# Altium PCB FMC_DAC_PSU.PcbDoc (part 3 of 3)
Units mil, origin at the board's own origin, x right, y up, seen from the top; angles counter-clockwise.
Board outline 748.03 x 2716.54 mil, 6 copper layers (TOP, G1, L2, L3, P4, BOTTOM), stack 50.473 mil thick; 122 components, 60 nets, 337 pads, 202 vias.
Unrouted connection lines stored in the file: 1.
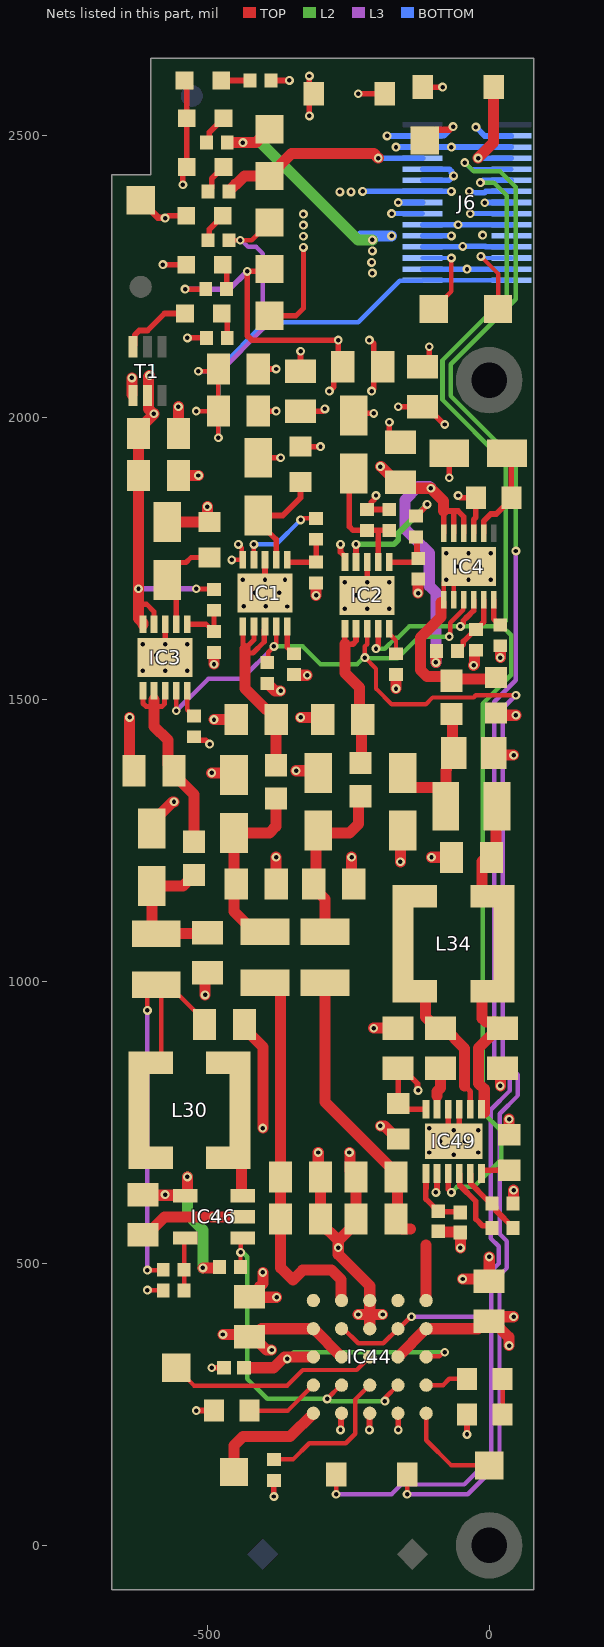
[diagram p6: the nets of this part, all layers, seen from the top]

## Via types
v1: diameter 15.75, hole 7.87, TOP to BOTTOM, tented both sides, 202 vias

## Nets (pads, with @x,y where several pads share a name; then routed paths per layer and width w, separated by ;. In a path a pad name is that pad's centre, name@x,y a point inside that pad or via, vN(x,y) a via of type N, cw(c..) or ccw(c..) an arc to the next point about the centre after c; other vN are vias at no path point)
GND: C1.1 C2.1 C3.1 C4.1 C5.1 C6.1 C7.2 C8.1 C9.1 C10.1 C11.1 C12.1 C13.1 C14.2 C15.1 C16.1 C17.1 C18.1 C19.2 C20.1 C21.1 C22.1 C23.1 C187.2 C190.1 C193.1 C195.1 C199.2 C207.1 C231.1 C261.2 C264.1 C265.1 C266.1 C267.1 C268.1 C269.1 C270.1 C271.1 C272.1 D1.2 D2.1 IC1.8 IC1.11 IC2.8 IC2.11 IC3.8 IC3.11 IC4.9 IC44.B5 IC44.C1 IC44.C2 IC44.C5 IC44.D5 IC46.2 IC49.9 IC49.10 IC49.13 J6.5 J6.6 J6.10 J6.12 J6.15 J6.16 J6.19 J6.20 J6.23 J6.24 J6.27 J6.28 LD2.2 LD3.1 LD4.1 LD5.1 LD6.1 R1.1 R3.1 R4.1 R5.1 R7.1 R8.1 R9.1 R10.1 R12.1 R14.1 R16.1 R17.1 R18.2 R125.2 R127.2 R129.1 R131.1 R136.2 T1.1 TP2.1 | length 4917.9
  TOP w7.87: v1(-606.3,452.76) -578.82,452.76 R131.1@-578.06,452
  TOP w10: v1(-578.74,2271.65) LD4.1@-537.4,2271.65 ; v1(-574.8,1598.43) IC3.8@-574.8,1633.86 ; v1@-569.31,2358.27 LD3.1@-537.4,2358.27 ; v1(-543.31,2413.39) -543.31,2437.99 LD2.2@-536.42,2444.88 LD5.1@-536.42,2531.5 -536.42,2594.49 LD6.1@-540.35,2598.43 ; R12.1@-523.62,1434.25 -517.2,1427.83 -502.64,1427.83 v1(-496.06,1421.26) ; v1(-519.69,239.09) R125.2@-488.19,239.09 ; v1(-492.13,314.96) C195.1@-470.47,314.96 ; C7.2@-409.45,1929.13 v1(-370.08,1929.13) ; C2.1@-409.45,2011.81 v1(-377.95,2011.81) ; C3.1@-409.45,2086.61 v1(-377.95,2086.61) ; v1(-397.64,1712.6) IC1.8@-397.64,1748.03 ; v1(-381.89,86.61) R129.1@-381.89,115.35 ; R4.1@-334.65,1948.82 v1(-299.21,1948.82) ; C10.1@-334.65,2082.68 v1(-334.65,2118.11) ; v1(-318.9,2535.43) -318.9,2566.93 D1.2@-311.02,2574.8 -318.9,2582.68 v1(-318.9,2606.3) ; v1(-263.78,204.72) -262.82,205.68 -262.82,233.3 IC44.D5@-261.87,234.26 ; C14.2@-240.16,2003.94 -236.22,2007.87 v1(-204.72,2007.87) ; v1(-216.54,1708.66) IC2.8@-216.54,1744.09 ; R9.1@-216.54,1837.4 R9.1@-215.75,1837.4 ; v1(-212.6,204.72) -212.23,205.09 -212.23,233.89 IC44.C5@-211.87,234.26 ; v1(-212.6,2137.8) -211.04,2137.8 -205.19,2131.94 -204.65,2131.94 -204.65,2106.22 C9.1@-188.98,2090.55 -204.65,2074.88 -204.65,2051.26 v1(-208.66,2047.24) ; v1(-200.79,1862.2) -200.79,1860.65 -203.66,1857.78 -203.66,1855.39 -208.66,1850.39 -208.66,1849.68 -209.33,1849.01 -209.33,1843.82 R9.1@-215.75,1837.4 ; R8.1@-177.17,1837.4 R9.1@-215.75,1837.4 ; v1(-177.17,1992.13) -177.17,1972.36 -161.5,1956.69 C20.1@-157.48,1956.69 ; IC44.B5@-161.87,234.26 -161.42,233.81 v1(-161.42,204.72) ; C21.1@-118.11,2090.55 -106.3,2102.36 v1(-106.3,2125.98) ; D2.1@-118.11,2586.61 v1(-82.68,2586.61) ; IC49.10@-72.83,773.62 -72.83,726.38 IC49.13@-62.99,716.54 -53.15,726.38 IC49.9@-53.15,773.62 ; v1(-70.87,1893.7) C23.1@-70.87,1937.01 ; v1(-55.12,1862.2) -51.18,1858.27 R18.2@-23.62,1858.27 -23.62,1823.58 -27.48,1819.72 -27.48,1795.35 IC4.9@-27.56,1795.28 ; v1(-39.37,196.85) R127.2@-39.37,232.28 ; v1@-8.17,2381.89 v1(-7.87,2381.58)
  TOP w11.81: TP2.1@-618.11,2385.83 -587.37,2355.08 -575.56,2355.08 v1(-574.8,2354.33) ; v1(-590.55,1578.74) -586.61,1574.8 IC3.11@-574.8,1574.8 ; IC1.11@-397.64,1688.98 -392.8,1693.82 -380.98,1693.82 v1(-362.2,1712.6) ; v1(-62.99,692.91) IC49.13@-62.99,716.54
  TOP w19.68: v1(-637.8,1468.5) -637.8,1381.89 C15.1@-629.92,1374.02 C15.1@-633.86,1370.08 ; T1.1@-633.86,2041.34 v1(-633.86,2070.87) ; C207.1@-614.17,551.18 -607.28,551.18 -575.79,582.68 v1(-488.19,582.68) IC46.2@-437.01,582.68 ; C261.2@-598.43,1271.65 -598.43,1282.48 -562.01,1318.9 v1(-559.06,1318.9) ; C19.2@-570.87,1814.96 R14.1@-496.06,1814.96 -500,1818.9 v1(-500,1842.52) ; C16.1@-551.18,1897.64 v1(-515.75,1897.64) ; C17.1@-551.18,1972.44 v1(-551.18,2019.68) ; v1(-503.94,976.38) -503.94,1011.81 C18.1@-500,1015.75 ; v1(-492.13,1370.08) -456.69,1370.08 C187.2@-452.76,1366.14 ; v1(-488.19,1464.57) C1.1@-448.82,1464.57 ; v1(-488.19,1562.99) R10.1@-488.19,1583.86 ; C231.1@-434.05,923.61 -434.05,916.72 -401.57,884.24 v1(-401.57,740.16) ; C193.1@-425.2,440.94 -418.31,440.94 -407.48,451.77 -407.48,458.66 -401.57,464.57 v1(-401.57,484.25) ; C193.1@-420.36,440.04 v1(-377.05,440.04) ; C6.1@-377.95,1173.23 v1(-377.95,1220.47) ; R3.1@-346.46,1544.49 -345.28,1543.31 v1(-322.83,1543.31) ; v1(-342.52,1374.02) -307.09,1374.02 C199.2@-303.15,1370.08 ; v1(-334.65,1468.5) -299.21,1468.5 C8.1@-295.28,1464.57 ; v1(-307.09,1685.04) R1.1@-307.09,1707.09 ; v1(-303.15,696.85) -303.15,657.48 C5.1@-299.21,653.54 C4.1@-299.21,578.74 -299.21,571.85 -267.72,540.35 ; v1(-248.03,696.85) -247.05,695.87 -247.05,664.37 C12.1@-236.22,653.54 C11.1@-236.22,578.74 -236.22,571.85 -267.72,540.35 ; v1(-244.09,1220.47) -244.09,1177.17 C13.1@-240.16,1173.23 ; v1(-232.28,409.45) -232.09,409.26 -211.87,409.26 ; IC44.C2@-211.87,384.26 -211.87,409.26 ; v1(-204.72,917.32) C264.1@-161.42,917.32 ; v1(-192.91,744.09) -186.02,744.09 -162.4,720.47 C265.1@-161.42,720.47 ; v1(-188.98,409.45) -189.17,409.26 -211.87,409.26 ; v1(-165.35,1519.68) R7.1@-165.35,1544.49 ; v1(-157.48,1212.6) -157.48,1263.78 C268.1@-153.54,1267.72 ; v1(-125.98,1688.98) R5.1@-125.98,1713.78 ; v1(-102.36,1220.47) C266.1@-66.93,1220.47 ; C272.1@-90.55,557.09 -89.57,556.1 -52.17,556.1 C271.1@-51.18,555.12 v1(-51.18,527.56) ; v1(-47.24,472.44) -3.94,472.44 C190.1@0,468.5 v1(0,511.81) ; v1(-27.56,1561.1) -25.98,1562.68 -25.98,1586.22 -24.41,1587.8 R16.1@-23.62,1587.8 ; C269.1@7.87,1405.51 11.81,1401.57 v1(43.31,1401.57) ; C22.1@11.81,1476.38 15.75,1472.44 v1(47.24,1472.44) ; v1(19.69,814.96) 19.69,842.52 C267.1@23.62,846.46 ; v1(19.69,1574.8) R17.1@19.69,1595.67 ; C270.1@35.43,728.35 v1(35.43,755.91) ; R136.2@42.13,606.3 43.31,607.48 v1(43.31,629.92) ; -267.72,540.35 v1(-267.72,528.05) -267.72,515.75 -211.87,459.9 IC44.C1@-211.87,434.26 -211.87,409.26
  BOTTOM w10: v1(-165.35,2480.31) J6.6@-118.11,2480.31 v1(-66.93,2480.31) J6.5@39.37,2480.31 ; v1(-161.42,2381.89) J6.16@-118.11,2381.89 ; J6.28@-118.11,2263.78 v1(-39.37,2263.78) J6.27@39.37,2263.78 ; J6.24@-118.11,2303.15 -47.93,2303.15 v1(-46.95,2304.13) -7.2,2304.13 -6.22,2303.15 J6.23@39.37,2303.15 ; J6.20@-118.11,2342.52 v1(-55.12,2342.52) J6.19@39.37,2342.52 ; J6.12@-118.11,2421.26 -71.51,2421.26 -63.63,2429.13 v1(-62.99,2429.13) ; J6.10@-118.11,2440.94 -70.87,2440.94 -66.95,2437.02 v1@-66.95,2434.64 ; v1(-7.87,2381.58) -7.64,2381.81 39.29,2381.81 J6.15@39.37,2381.89
  other v1: -106.3,696.85 -19.69,696.85 -86.61,716.54 -43.31,716.54 -62.99,736.22 -19.69,736.22 -106.3,740.16 -614.17,1551.18 -574.8,1551.18 -535.43,1551.18 -555.12,1578.74 -614.17,1598.43 -535.43,1598.43 -255.91,1661.42 -216.54,1661.42 -177.17,1661.42 -358.27,1665.35 -435.63,1666.12 -396.26,1666.12 -236.22,1685.04 -196.85,1685.04 -415.94,1689.74 -372.64,1689.74 -255.91,1708.66 -177.17,1708.66 -437.01,1712.6
N3V0A: C20.2 C21.2 D2.2 IC4.10 IC4.11 IC4.12 J6.7 J6.8 R15.2 R20.2 TP32.1 | length 1355.7
  TOP w10: v1(-161.42,2019.68) C21.2@-118.11,2019.68 -111.22,2019.68 -79.72,1988.19 v1(-78.74,1988.19) ; IC4.12@-80.71,1795.28 -80.71,1834.65 -55.12,1834.65 -45.28,1824.81 IC4.10@-45.28,1795.28 ; IC4.11@-62.99,1795.28 -62.99,1830.71
  TOP w19.68: R20.2@-461.81,2401.57 -461.81,2402.36 -449.88,2414.29 -449.09,2414.29 -434.25,2429.13 TP32.1@-389.76,2429.13 -350.39,2468.5 -204.72,2468.5 v1(-196.85,2460.63) ; v1(-192.91,1913.39) -191.93,1913.39 -164.37,1885.83 C20.2@-157.48,1885.83 -146.65,1875 v1(-103.35,1875) -80.71,1852.36 -80.71,1834.65 ; v1(-94.66,1566.16) -94.66,1585.26 R15.2@-93.31,1586.61 ; v1(-19.69,2460.63) 7.87,2488.19 D2.2@7.87,2586.61
  L3 w19.68: v1(-103.35,1875) -106.3,1877.95 -125.98,1877.95 -149.61,1854.33 -149.61,1803.15 -118.11,1771.65 -117.83,1771.65 -106.3,1760.12 -106.3,1701.42 -94.66,1689.77 v1(-94.66,1566.16)
  BOTTOM w10: v1(-196.85,2460.63) J6.8@-118.11,2460.63 ; v1(-19.69,2460.63) J6.7@39.37,2460.63
N3V5: C266.2 C267.2 IC49.7 L34.2 L35.1 | length 437.3
  TOP w19.68: L34.2@-12.8,982.55 -12.8,935.04 -5.91,928.15 12.8,928.15 C267.2@23.62,917.32 16.73,917.32 -18.78,881.81 -18.78,819.64 -8.78,809.64 IC49.7@-8.78,767.72 ; L34.2@-12.8,1151.3 -12.8,1213.09 12.3,1238.19 12.3,1309.55 L35.1@13.78,1311.02
NetC1_2: C1.2 IC1.1 IC1.2 IC1.3 L1.2 | length 382.7
  TOP w9: IC1.1@-437.01,1629.92 -437.01,1594.49 -433.07,1590.55 -417.32,1606.3 IC1.2@-417.32,1625.98 ; -433.07,1582.68 -419,1582.68 -399.04,1602.64 -399.04,1624.58 IC1.3@-397.64,1625.98
  TOP w19.68: -433.07,1590.55 -433.07,1519.68 -395.67,1482.28 -388.78,1482.28 -377.95,1471.46 C1.2@-377.95,1464.57 L1.2@-377.95,1383.86
NetC7_1: C7.1 IC1.7 R4.2 | length 207.2
  TOP w10: IC1.7@-377.95,1748.03 -377.95,1784.45 -409.45,1815.94 C7.1@-409.45,1826.77 -366.14,1826.77 -334.65,1858.27 R4.2@-334.65,1885.83
NetC8_2: C8.2 IC2.1 IC2.2 L2.2 | length 296.7
  TOP w10: IC2.1@-255.91,1625.98 -255.91,1598.43 -242.08,1598.43 -236.22,1604.28 IC2.2@-236.22,1625.98
  TOP w19.68: -255.91,1598.43 -255.91,1547.24 -230.32,1521.65 -230.32,1470.47 C8.2@-224.41,1464.57 -226.38,1462.6 -226.38,1389.76 L2.2@-228.35,1387.8
NetC14_1: C14.1 IC2.7 R8.2 R9.2 | length 227.7
  TOP w10: C14.1@-240.16,1901.57 -248.03,1893.7 -248.03,1807.09 -241.34,1800.39 R9.2@-216.54,1800.39 -196.85,1800.39 ; IC2.7@-196.85,1744.09 -196.85,1800.39 ; R8.2@-177.17,1800.39 -196.85,1800.39
NetC15_2: C15.2 IC3.1 IC3.2 IC3.3 L3.2 | length 369.6
  TOP w9: IC3.1@-614.17,1515.75 -614.17,1493.46 -608.9,1488.19 -594.49,1488.19 -580.08,1488.19 -576.21,1492.06 -576.21,1514.34 IC3.3@-574.8,1515.75
  TOP w19.68: IC3.2@-594.49,1500 -594.49,1488.19 -594.49,1452.76 -569.88,1428.15 -569.88,1384.84 C15.2@-559.06,1374.02 -559.06,1367.13 -523.62,1331.69 L3.2@-523.62,1248.03
NetC19_1: C19.1 IC3.7 R14.2 | length 182.7
  TOP w9: IC3.7@-555.12,1633.86 -555.12,1696.85 C19.1@-570.87,1712.6 -570.87,1723.43 -550.76,1743.53 -537.68,1743.53 -529.25,1751.97 R14.2@-496.06,1751.97
NetC22_2: C22.2 IC4.1 IC4.2 IC4.13 L36.2 | length 386.1
  TOP w7.87: IC4.1@-80.71,1677.17 -80.71,1707.95 v1(-76.07,1712.6) ; IC4.2@-62.99,1677.17 -62.99,1709.65 IC4.13@-36.42,1736.22
  TOP w19.68: IC4.1@-85.63,1672.24 -85.63,1646.65 -122.05,1610.24 -122.05,1553.01 -110.52,1541.48 -74.94,1541.48 L36.2@-66.93,1533.46 -63.98,1536.42 8.86,1536.42 C22.2@11.81,1539.37
  other v1: -36.7,1712.6 2.67,1712.6 -56.38,1736.22 -17.01,1736.22 -76.07,1759.84 -36.7,1759.84 2.67,1759.84
NetC23_2: C23.2 IC4.8 R18.1 | length 171.1
  TOP w10: IC4.8@-9.84,1795.28 -9.76,1795.35 -9.76,1817.01 2.67,1829.44 12.51,1829.44 39.37,1856.3 R18.1@39.37,1858.27 39.37,1929.13 C23.2@31.5,1937.01
NetC195_2: C195.2 IC44.A3 IC44.E3 | length 447.2
  TOP w7.87: IC44.A3@-111.87,334.26 -110.98,335.15 -88.24,335.15 -80.87,342.52 v1(-78.74,342.52)
  TOP w19.68: C195.2@-435.04,314.96 -382.45,314.96 v1@-363.15,334.26 ; v1@-358.27,334.26 IC44.E3@-311.87,334.26
  L2 w7.87: v1(-358.27,330.71) -346.46,342.52 v1(-78.74,342.52)
NetC263_1: C263.1 IC49.11 | length 51.8
  TOP w19.68: -92.52,797.07 -92.52,805.12 -86.61,811.02 C263.1@-86.61,846.46
NetC263_2: C263.2 IC49.8 L34.1 | length 250
  TOP w10: -43.46,815.12 -33.46,805.12 IC49.8@-33.46,773.62
  TOP w19.68: L34.1@-113.19,982.55 -113.19,937.01 -93.5,917.32 -79.72,917.32 -43.46,881.06 -43.46,815.12
NetC268_2: C268.2 C269.2 L35.2 L36.1 | length 273.4
  TOP w19.68: C268.2@-153.54,1370.08 -153.54,1359.25 -138.78,1344.49 -90.55,1344.49 L35.2@-76.77,1330.71 ; L35.2@-76.77,1311.02 L35.2@-76.77,1330.71 ; L36.1@-66.93,1474.41 -64.96,1472.44 -64.96,1415.35 -59.06,1409.45 -75.79,1392.72 -75.79,1376.26 -76.77,1375.28 L35.2@-76.77,1330.71
NetC270_2: C270.2 IC49.6 | length 54.6
  TOP w10: IC49.6@-13.78,659.45 -13.78,664.45 -12.87,665.35 C270.2@35.43,665.35
NetC271_2: C271.2 C272.2 IC49.1 | length 116.2
  TOP w10: IC49.1@-112.2,659.45 -112.2,633.55 -112.36,633.39 -112.36,614.33 -89.57,591.54 -52.17,591.54 C271.2@-51.18,590.55
NetIC1_5: IC1.5 R3.2 | length 49.8
  TOP w9: IC1.5@-358.27,1625.98 -358.27,1592.52 -347.24,1581.5 R3.2@-346.46,1581.5
NetIC1_6: IC1.6 R1.2 R2.1 | length 95.1
  TOP w10: IC1.6@-358.27,1748.03 -358.27,1745 -357.36,1744.09 R1.2@-307.09,1744.09 R2.1@-307.09,1784.65
NetIC2_5: IC2.5 R7.2 | length 49.6
  TOP w7.87: IC2.5@-177.17,1625.98 -177.17,1616.14 -175.2,1614.17 -174.8,1614.17 -165.35,1604.72 R7.2@-165.35,1581.5
NetIC2_6: IC2.6 R5.2 R6.1 | length 93.4
  TOP w10: IC2.6@-177.17,1744.09 -133.46,1744.09 -126.77,1750.79 R5.2@-125.98,1750.79 -127.95,1752.76 -127.95,1786.61 R6.1@-129.92,1788.58
NetIC3_5: IC3.5 R12.2 | length 49.8
  TOP w8: IC3.5@-535.43,1515.75 -535.43,1482.28 -524.41,1471.26 R12.2@-523.62,1471.26
NetIC3_6: IC3.6 R10.2 R11.1 | length 90.4
  TOP w9: IC3.6@-535.43,1633.86 -501.97,1633.86 -488.98,1620.87 R10.2@-488.19,1620.87 R11.1@-488.19,1658.66
NetIC4_5: IC4.5 R15.1 R16.2 | length 110.7
  TOP w10: R15.1@-56.3,1586.61 -56.3,1587.4 -45.83,1597.87 -45.83,1603.39 -24.41,1624.8 -22.83,1624.8 -9.84,1637.8 IC4.5@-9.84,1677.17
NetIC4_6: IC4.6 R17.2 | length 49.8
  TOP w10: IC4.6@7.87,1677.17 7.87,1643.7 18.9,1632.68 R17.2@19.69,1632.68
NetIC44_A4: IC44.A4 R126.1 | length 77.1
  TOP w8: IC44.A4@-111.87,284.26 -81.88,284.26 -70.87,295.28 R126.1@-39.37,295.28
NetIC44_A5: IC44.A5 TP26.1 | length 178.1
  TOP w7.87: IC44.A5@-111.87,234.26 -111.87,186.67 -66.93,141.73 TP26.1@0,141.73
NetIC44_C3: IC44.C3 TP27.1 | length 377.3
  TOP w7.87: TP27.1@-555.12,314.96 -523.62,283.46 -358.27,283.46 -330.71,311.02 -235.1,311.02 IC44.C3@-211.87,334.26
NetIC44_C4: IC44.C4 R129.2 | length 260.2
  TOP w7.87: R129.2@-381.89,152.36 -348.03,152.36 -319.29,181.1 -254.41,181.1 -237.42,198.09 -237.42,258.7 IC44.C4@-211.87,284.26
NetIC44_E4: IC44.E4 R125.1 | length 132
  TOP w7.87: R125.1@-425.2,239.09 -357.03,239.09 IC44.E4@-311.87,284.26
NetIC44_E5: IC44.E5 TP25.1 | length 211.8
  TOP w19.68: TP25.1@-452.76,129.92 -452.76,177.17 -437.01,192.91 -353.21,192.91 IC44.E5@-311.87,234.26
NetIC46_3: IC46.3 L30.1 | length 153.9
  TOP w19.68: L30.1@-441.93,771.66 -439.47,769.2 -439.47,622.05 -437.5,620.08 IC46.3@-437.01,620.08
NetIC46_5: IC46.5 R130.1 R131.2 | length 94
  TOP w7.87: R131.2@-541.06,452 R130.1@-541.06,489 -541.06,543.59 IC46.5@-539.37,545.28
NetIC49_4: IC49.4 R135.1 | length 128.2
  TOP w10: IC49.4@-53.15,659.45 -52.24,658.54 -52.24,638.86 -23.62,610.24 -23.62,578.74 -11.81,566.93 1.18,566.93 R135.1@5.12,562.99
NetIC49_5: IC49.5 R135.2 R136.1 | length 129.7
  TOP w10: IC49.5@-33.46,659.45 -32.56,658.54 -32.56,641.45 -4.61,613.5 -1.3,613.5 5.12,607.09 R136.1@5.12,606.3 11.54,599.88 11.54,594.37 42.13,563.78 R135.2@42.13,562.99
NetJ6_25: J6.25 TP33.1 | length 161.1
  TOP w7.87: v1(-14.61,2286.26) 15.75,2255.91 TP33.1@15.75,2192.91
  BOTTOM w7.87: v1(-14.61,2286.26) -12.48,2286.26 -9.68,2283.46 J6.25@39.37,2283.46
NetJ6_26: J6.26 TP34.1 | length 154.8
  TOP w7.87: TP34.1@-98.43,2192.91 -66.93,2224.41 v1(-66.93,2283.46)
  BOTTOM w7.87: J6.26@-118.11,2283.46 v1(-66.93,2283.46)
NetLD1_1: LD1.1 T1.6 | length 127.4
  TOP w10: T1.6@-631.89,2125.98 -629.02,2128.86 -629.02,2146.57 -620.8,2154.79 -606.09,2154.79 -575.85,2185.04 LD1.1@-539.37,2185.04
NetLD1_2: LD1.2 R19.1 | length 47.4
  TOP w10: LD1.2@-474.41,2185.04 -464.57,2175.2 R19.1@-464.57,2141.73
NetLD2_1: LD2.1 R20.1 | length 54.6
  TOP w10: R20.1@-498.82,2401.57 -492.4,2407.99 -492.4,2423.94 LD2.1@-471.46,2444.88
NetLD3_2: LD3.2 R21.1 | length 54.2
  TOP w10: R21.1@-498.82,2314.96 -496.33,2317.45 -496.33,2334.38 LD3.2@-472.44,2358.27
NetLD4_2: LD4.2 R22.1 | length 46.1
  TOP w10: LD4.2@-472.44,2271.65 -465.75,2264.96 R22.1@-465.75,2228.35
NetLD5_2: LD5.2 R23.1 | length 55.8
  TOP w10: R23.1@-501.57,2488.19 -496.35,2493.42 -496.35,2506.61 LD5.2@-471.46,2531.5
NetLD6_2: LD6.2 R24.1 | length 51.4
  TOP w10: LD6.2@-475.39,2598.43 R24.1@-424.02,2598.43
NetR126_2: R126.2 R127.1 | length 63
  TOP w8: R127.1@23.62,232.28 R126.2@23.62,295.28
P1V8A: C16.2 C17.2 IC3.9 IC3.10 J6.17 J6.18 R11.2 T1.2 TP30.1 | length 948.3
  TOP w9: -622.05,1669.29 -607.63,1669.29 -594.49,1656.15 IC3.9@-594.49,1633.86 ; v1(-519.69,1696.85) -519.09,1696.26 -488.78,1696.26 R11.2@-488.19,1695.67 ; TP30.1@-389.76,2181.1 -342.52,2181.1 -329.49,2194.13 v1(-329.49,2302.31)
  TOP w19.68: IC3.10@-614.17,1633.86 -614.17,1635.83 -622.05,1643.7 -622.05,1669.29 v1(-622.05,1696.85) C16.2@-622.05,1897.64 -622.05,1979.33 -594.8,2006.58 v1(-594.8,2007.19) ; T1.2@-604.33,2037.4 -604.33,2015.43 v1@-595.45,2006.55 ; T1.2@-604.33,2041.34 -604.33,2072.83 v1(-602.36,2074.8)
  L3 w9: v1(-622.05,1696.85) v1(-519.69,1696.85)
  BOTTOM w9: v1(-173.23,2362.2) J6.18@-118.11,2362.2 ; v1(-33.62,2362.2) J6.17@39.37,2362.2
  other v1: -329.49,2322 -329.49,2341.68 -329.49,2361.37
P2V3: C18.2 C261.1 L3.1 L32.2 | length 262.2
  TOP w19.68: L3.1@-523.62,1188.98 -543.31,1169.29 C261.1@-598.43,1169.29 -598.43,1092.52 L32.2@-590.55,1084.65 -589.57,1085.63 -500.98,1085.63 C18.2@-500,1086.61
P2V3_N: C231.2 L30.2 L32.1 R130.2 | length 789.1
  TOP w7.87: v1(-606.3,488.19) -578.87,488.19 R130.2@-578.06,489 ; v1(-606.3,948.82) -606.3,978.35 L32.1@-590.55,994.09 L32.1@-581.69,985.23 ; L30.2@-581.69,856.03 L32.1@-581.69,985.23 ; C231.2@-504.92,923.61 -504.92,930.5 -548.83,974.41 -570.87,974.41 L32.1@-581.69,985.23
  L3 w7.87: v1(-606.3,488.19) v1(-606.3,948.82)
P3V3: C207.2 IC46.4 J6.21 J6.22 R13.2 R23.2 R128.1 TP31.1 | length 835.8
  TOP w19.68: C207.2@-614.17,622.05 -613.19,621.06 -540.35,621.06 IC46.4@-539.37,620.08 -537.4,620.08 -535.43,622.05 v1(-535.43,653.54) ; v1(-507.87,492.13) -479.9,492.13 R128.1@-478.42,493.61 ; R23.2@-464.57,2488.19 v1(-437.01,2488.19) -413.39,2488.19 TP31.1@-389.76,2511.81 ; R13.2@-393.7,1528.74 -392.91,1528.74 -379.92,1515.75 v1(-370.08,1515.75)
  L2 w19.68: v1(-535.43,653.54) -535.43,586.61 -507.87,559.06 v1(-507.87,492.13) ; v1(-437.01,2488.19) -405.51,2488.19 -233.05,2315.73 v1(-207.28,2315.73)
  BOTTOM w10: J6.22@-118.11,2322.83 v1(-66.93,2322.83)
  BOTTOM w19.68: -228.35,2322.83 v1(-173.23,2322.83)
  other v1: -574.8,622.05 -207.28,2256.67 -208.66,2275.59 -207.28,2296.04 -11.81,2323.98
P3V3A: C2.2 C3.2 IC1.9 IC1.10 J6.29 J6.30 R2.2 R21.2 TP29.1 | length 1526.7
  TOP w7.87: v1(-519.69,2011.81) C2.2@-480.31,2011.81 ; v1(-515.75,2082.68) -484.25,2082.68 C3.2@-480.31,2086.61 C2.2@-480.31,2011.81 ; v1(-480.31,1964.57) C2.2@-480.31,2011.81 ; R21.2@-461.81,2314.96 v1(-441.54,2314.96) -421.26,2314.96 TP29.1@-389.76,2346.46 ; v1(-456.69,1748.03) IC1.10@-437.01,1748.03 -438.98,1750 -438.98,1769.69 v1(-444.88,1775.59) ; IC1.9@-417.32,1748.03 v1(-417.32,1775.59) ; v1(-334.65,1818.9) -332.51,1818.9 -329.76,1821.65 R2.2@-307.09,1821.65
  L3 w7.87: v1(-515.75,2082.68) -476.38,2082.68 -401.57,2157.48 -401.57,2291.34 -413.39,2303.15 -427.59,2303.15 -439.4,2314.96 v1(-441.54,2314.96)
  BOTTOM w7.87: v1(-480.31,1964.57) -480.31,2086.61 -397.64,2169.29 -232.28,2169.29 -158.45,2243.12 -119.08,2243.12 J6.30@-118.11,2244.09 J6.29@39.37,2244.09 ; v1(-417.32,1775.59) -377.95,1775.59 v1(-334.65,1818.9)
P3V7: C6.2 C187.1 L1.1 L19.2 | length 338.5
  TOP w19.68: L19.2@-397.64,1088.58 -417.32,1088.58 -452.76,1124.02 C187.1@-452.76,1263.78 -389.76,1263.78 -377.95,1275.59 L1.1@-377.95,1324.8
P3V7_N: C4.2 C5.2 IC44.D1 IC44.E1 L19.1 | length 693.1
  TOP w19.68: L19.1@-397.64,998.03 -383.86,998.03 -370.08,984.25 C5.2@-370.08,653.54 C4.2@-370.08,578.74 -370.08,492.47 -348.25,470.65 -330.71,488.19 -279.53,488.19 -262.62,471.28 -262.62,435.01 IC44.D1@-261.87,434.26
P5V0A: C9.2 C10.2 D1.1 IC2.9 IC2.10 J6.13 J6.14 R6.2 R22.2 TP28.1 | length 1167.6
  TOP w10: v1(-539.37,2228.35) R22.2@-502.76,2228.35 ; TP28.1@-389.76,2263.78 -393.7,2259.84 v1(-429.13,2259.84) -429.13,2145.67 -421.26,2137.8 v1(-267.72,2137.8) -267.72,2098.43 C9.2@-259.84,2090.55 -275.51,2074.88 -275.51,2055.2 v1(-283.46,2047.24) ; C10.2@-334.65,2011.81 -295.28,2011.81 v1(-291.34,2015.75) ; v1(-263.78,1775.59) -263.78,1761.81 -255.91,1753.94 IC2.10@-255.91,1744.09 ; IC2.9@-236.22,1744.09 v1(-236.22,1775.59) ; v1(-232.28,2574.8) D1.1@-185.04,2574.8 ; R6.2@-129.92,1825.59 -129.13,1825.59 -110.24,1844.49 v1(-110.24,1846.46)
  L3 w10: v1(-539.37,2228.35) -460.63,2228.35 v1(-429.13,2259.84)
  L2 w10: v1(-236.22,1775.59) -169.29,1775.59 -161.42,1783.46 -161.42,1795.28 v1(-110.24,1846.46)
  BOTTOM w10: v1(-224.41,2401.57) v1(-66.93,2401.57) ; v1(-35.43,2401.57) -31.5,2401.57 -29.37,2399.45 -8.34,2399.45 -6.22,2401.57 J6.13@39.37,2401.57
  other v1: -264.82,2400.81 -245.13,2400.81
P5V5: C13.2 C199.1 L2.1 L28.2 | length 320.6
  TOP w19.68: L28.2@-291.34,1088.58 -291.34,1146.65 -311.02,1166.34 C13.2@-311.02,1173.23 -307.09,1177.17 -307.09,1263.78 C199.1@-303.15,1267.72 -299.21,1263.78 -247.75,1263.78 -232,1279.53 -232,1325.08 L2.1@-228.35,1328.74
P5V5_N: C11.2 C12.2 IC44.A1 IC44.B1 L28.1 | length 613
  TOP w19.68: L28.1@-291.34,998.03 -291.34,786.42 -162.62,657.7 C11.2@-162.62,575.02 ; C11.2@-165.35,578.74 -165.35,577.76 C11.2@-162.62,575.02 ; IC44.B1@-162.62,435.01 IC44.B1@-161.87,434.26 ; -139.89,561.02 -154.53,561.02 -162.62,569.12 C11.2@-162.62,575.02 ; IC44.A1@-111.87,434.26 -111.87,533
P12V0: C190.2 C193.2 C264.2 C265.2 IC44.A2 IC44.B3 IC44.D3 IC44.E2 IC49.2 IC49.12 J6.3 J6.4 R19.2 R24.2 TP1.1 | length 1106.5
  TOP w10: v1(-535.43,2141.73) R19.2@-501.57,2141.73 ; R24.2@-387.01,2598.43 v1(-354.33,2598.43) ; v1(-125.98,807.09) -127.08,808.19 -127.08,819.01 -154.53,846.46 C264.2@-161.42,846.46 C265.2@-161.42,783.46 -151.57,773.62 IC49.12@-112.2,773.62 ; v1(-94.49,625.98) -94.49,627.54 -92.52,629.51 IC49.2@-92.52,659.45
  TOP w11.81: TP1.1@-114.17,2492.13 -95.08,2511.22 -70.55,2511.22 -65.16,2516.62 v1(-64.09,2516.62)
  TOP w19.68: v1(-472.44,374.02) -429.13,374.02 C193.2@-425.2,370.08 C193.2@-418.31,370.08 ; v1(-385.85,346.48) -394.71,346.48 C193.2@-418.31,370.08 ; IC44.D3@-261.87,334.26 IC44.E2@-311.87,384.26 -404.13,384.26 C193.2@-418.31,370.08 ; IC44.B3@-161.87,334.26 IC44.A2@-111.87,384.26 -20.27,384.26 -6.89,397.64 C190.2@0,397.64 ; v1(35.43,354.33) 35.43,369.09 6.89,397.64 C190.2@0,397.64 ; v1(43.31,405.51) 7.87,405.51 C190.2@0,397.64
  BOTTOM w10: v1(-181.1,2500) J6.4@-118.11,2500 -118.03,2500.08 -80.63,2500.08 v1(-64.09,2516.62) ; v1(-23.62,2515.75) -7.87,2500 J6.3@39.37,2500
PG_3V7_5V5: IC44.B4 IC44.D4 IC46.1 R128.2 | length 619.1
  TOP w7.87: R128.2@-441.42,493.61 -441.18,493.84 -441.18,519.45 v1(-440.94,519.68) -440.94,541.34 IC46.1@-437.01,545.28 ; v1(-287.4,259.84) -262.98,284.26 IC44.D4@-261.87,284.26 ; v1(-185.04,255.91) -185.04,261.09 IC44.B4@-161.87,284.26
  L2 w7.87: v1(-440.94,519.68) -437.01,519.68 -429.13,511.81 -429.13,295.28 -393.7,259.84 v1(-287.4,259.84) -285.27,259.84 -281.33,255.91 v1(-185.04,255.91)
PG_DAC: D3.2 IC1.4 IC2.3 IC3.4 IC4.3 R13.1 | length 2754.3
  TOP w7.87: v1(-555.12,1480.31) IC3.4@-555.12,1515.75 ; R13.1@-393.7,1565.75 -392.01,1567.43 -392.01,1584.36 v1(-381.89,1594.49) -381.89,1596.62 -377.95,1600.56 IC1.4@-377.95,1625.98 ; IC2.3@-216.54,1625.98 -216.54,1598.58 -220.47,1594.64 v1(-220.47,1574.8) -200.79,1555.12 -200.79,1519.68 -173.23,1492.13 -112.2,1492.13 -100.39,1503.94 -27.56,1503.94 -23.62,1507.87 v1(47.24,1507.87) ; v1(-145.67,90.55) D3.2@-145.67,125.98
  TOP w8: v1(-70.87,1612.05) -69.38,1613.53 -69.38,1636.52 -63.97,1641.93 -63.97,1642.01 -46.2,1659.79 -46.2,1676.24 IC4.3@-45.35,1677.09
  L3 w7.87: v1(-555.12,1480.31) -498.03,1537.4 -438.98,1537.4 v1(-381.89,1594.49) ; v1(-145.67,90.55) -37.93,90.55 18.23,146.71 18.23,478.86 31.5,492.13 31.5,539.37 18.62,552.24 18.62,765.69 50.97,798.04 50.97,834.85 24.21,861.61 24.21,1484.84 v1(47.24,1507.87)
  L2 w7.87: v1(-381.89,1594.49) -330.71,1594.49 -299.21,1562.99 -234.41,1562.99 -222.6,1574.8 v1(-220.47,1574.8) -216.54,1574.8 -215.47,1573.74 -162.48,1573.74 -124.17,1612.05 v1(-70.87,1612.05)
PGOOD: IC2.4 IC4.4 IC49.3 J6.11 | length 2444.2
  TOP w10: v1(-200.79,1590.55) -200.79,1592.11 -196.85,1596.04 IC2.4@-196.85,1625.98 ; IC49.3@-72.83,659.45 -72.83,631.89 v1(-66.93,625.98) ; v1(-51.18,1629.92) -45.83,1635.28 -45.83,1640.36 -38.96,1647.23 -38.36,1647.23 -27.64,1657.95 -27.64,1677.09 IC4.4@-27.56,1677.17
  L2 w8: v1(-200.79,1590.55) -185.04,1590.55 -165.35,1610.24 -161.42,1610.24 -141.73,1629.92 v1(-51.18,1629.92) 23.62,1629.92 ; v1(-66.93,625.98) -57.24,635.67 -27.29,635.67 21.14,684.1 21.14,735.52 -11.81,768.48 -11.81,1492.88 39.37,1544.06 39.37,1614.17 23.62,1629.92 ; v1(-15.75,2417.32) 7.87,2417.32 31.5,2393.7 31.5,2216.54 -82.84,2102.2 -82.84,2031.91 29.37,1919.69 29.37,1639.61 23.62,1633.86 23.62,1629.92
  BOTTOM w10: v1(-15.75,2417.32) -14.19,2417.32 -10.26,2421.26 J6.11@39.37,2421.26
TEMP_ALARM: D3.1 IC44.B2 IC44.D2 J6.9 | length 3231.6
  TOP w7.87: v1(-271.65,90.55) D3.1@-271.65,125.98 ; IC44.D2@-261.87,384.26 -258.28,384.26 -232.28,358.27 -187.86,358.27 IC44.B2@-161.87,384.26 -160.46,384.26 -139.2,405.51 v1(-137.8,405.51)
  L3 w7.87: v1(-271.65,90.55) -173.23,90.55 -155.83,107.95 -44.12,107.95 3.94,156 3.94,405.51 ; v1(-137.8,405.51) 3.94,405.51 ; v1(47.24,1763.78) 47.24,1534.54 9.15,1496.45 9.15,855.37 36.72,827.79 36.72,806.68 2.87,772.83 2.87,544.37 16.81,530.43 16.81,499.94 3.94,487.07 3.94,405.51
  L2 w7.87: v1(-43.31,2452.76) -27.56,2437.01 19.69,2437.01 47.24,2409.45 47.24,2210.33 -67.99,2095.09 -67.99,2038.77 47.24,1923.53 v1(47.24,1763.78)
  BOTTOM w7.87: v1(-43.31,2452.76) -31.5,2440.94 J6.9@39.37,2440.94
pads on no net: B1.1 B2.1 FTG1.1 FTG2.FTG2 FTG3.1 FTG4.FTG2 IC4.7 J6.1 J6.2 T1.3 T1.4 T1.5

## Polygon pours and split planes (outlines as drawn)
P12V0 on BOTTOM "P12V0_L06_P012" (solid, remove dead copper, pour order 12): 39.37,2480.31 -220.47,2480.31 -535.43,2165.35 -535.43,1728.35 -464.57,1657.48 -452.76,1645.67 47.24,1645.67 74.8,1618.11 74.8,-62.99 62.99,-74.8 -657.48,-74.8 -665.35,-66.93 -665.35,2421.26 -661.42,2425.2 -598.43,2425.2 -590.55,2433.07 -590.55,2622.05 -582.68,2629.92 66.93,2629.92 74.8,2622.05 74.8,2500
GND on BOTTOM "GND_L06_P015" (solid, remove dead copper, pour order 15): -448.82,1653.54 47.24,1653.54 86.61,1692.91 86.61,2098.43 62.99,2122.05 -74.8,2122.05 -228.35,1968.5 -228.35,1842.52 -346.46,1724.41 -448.82,1724.41
P3V3 on BOTTOM "P3V3_L06_P011" (solid, remove dead copper, pour order 11): -248.03,2342.52 39.37,2342.52 39.37,2303.15 -157.48,2303.15 -173.23,2287.4 -173.23,2263.78 -204.72,2232.28 -248.03,2232.28
P3V3A on BOTTOM "NONET_L06_P-001" (solid, remove dead copper, pour order 7): -523.62,1751.97 -523.62,2157.48 -456.69,2224.41 -204.72,2224.41 -161.42,2267.72 82.68,2267.72 86.61,2263.78 86.61,2141.73 70.87,2125.98 -86.61,2125.98 -232.28,1980.31 -232.28,1846.46 -346.46,1732.28 -503.94,1732.28
GND on L3 "GND_L04_P014" (solid, pour order 14): -669.29,-78.74 78.74,-78.74 82.68,-74.8 82.68,2637.8 -594.49,2637.8 -598.43,2641.73 -602.36,2637.8 -602.36,2433.07 -669.29,2433.07 -669.29,2283.46 -661.42,2283.46 -566.93,2377.95 -322.83,2377.95 -318.9,2381.89 -318.9,2602.36 -303.15,2618.11 -208.66,2618.11 -204.72,2614.17 -204.72,2492.13 -11.81,2492.13 15.75,2464.57 15.75,2393.7 -106.3,2271.65 -106.3,1929.13 -70.87,1893.7 -70.87,1803.15 -196.85,1803.15 -196.85,1744.09 -212.6,1728.35 -669.29,1728.35
P1V8A on L3 "NONET_L06_P-001" (solid, remove dead copper, pour order 4): -318.9,2374.02 -318.9,2295.28 -503.94,2295.28 -559.06,2240.16 -559.06,1775.59 -582.68,1751.97 -661.42,1751.97 -661.42,2271.65 -559.06,2374.02
N3V0A on L3 "NONET_L06_P-001" (solid, remove dead copper, pour order 3): -204.72,2480.31 -82.68,2480.31 -11.81,2480.31 7.87,2460.63 7.87,2397.64 -110.24,2279.53 -110.24,1921.26 -78.74,1889.76 -78.74,1811.02 -177.17,1811.02 -204.72,1838.58
P5V0A on L3 "NONET_L06_P-001" (solid, remove dead copper, pour order 1): -311.02,2610.24 -212.6,2610.24 -212.6,1830.71 -200.79,1818.9 -200.79,1755.91 -224.41,1732.28 -291.34,1732.28 -311.02,1751.97
P3V3A on L3 "NONET_L06_P-001" (solid, remove dead copper, pour order 0): -535.43,1787.4 -484.25,1736.22 -374.02,1736.22 -318.9,1791.34 -318.9,2279.53 -535.43,2279.53
GND on TOP "GND_L01_P016" (solid, remove dead copper, pour order 16): -669.29,464.57 -559.06,464.57 -555.12,460.63 -468.5,460.63 -456.69,448.82 -456.69,181.1 -427.95,152.36 -348.03,152.36 -319.29,181.1 -241.38,181.1 -217.75,204.72 -142.89,204.72 -79.9,141.73 -59.06,141.73 -59.06,539.37 78.74,539.37 78.74,-78.74 -669.29,-78.74
P5V0A on TOP "NONET_L06_P-001" (solid, remove dead copper, pour order 2): -311.02,2385.83 -307.09,2381.89 -3.94,2381.89 -3.94,2440.94 -307.09,2440.94 -318.9,2429.13 -318.9,2393.7
P5V5_N on TOP "NONET_L06_P-001" (solid, remove dead copper, pour order 10): -334.65,1035.43 -220.47,1035.43 -220.47,763.78 -122.05,665.35 -122.05,574.8 -82.68,535.43 -82.68,417.32 -86.61,413.39 -173.23,413.39 -192.91,433.07 -192.91,527.56 -200.79,535.43 -200.79,673.23 -314.96,787.4 -314.96,917.32 -342.52,944.88 -342.52,1027.56
P3V7_N on TOP "NONET_L06_P-001" (solid, remove dead copper, pour order 9): -248.03,413.39 -228.35,433.07 -228.35,480.31 -318.9,570.87 -318.9,917.32 -346.46,944.88 -346.46,1035.43 -456.69,1035.43 -456.69,968.5 -444.88,956.69 -413.39,956.69 -405.51,948.82 -405.51,440.94 -377.95,413.39
P3V3 on TOP "NONET_L06_P-001" (solid, remove dead copper, pour order 8): 7.87,2338.58 0,2338.58 -224.41,2338.58 -224.41,2244.09 -141.73,2244.09 -94.49,2291.34 7.87,2291.34
P1V8A on TOP "NONET_L06_P-001" (solid, remove dead copper, pour order 5): -7.87,2374.02 -3.94,2370.08 -3.94,2350.39 -11.81,2342.52 -228.35,2342.52 -279.53,2291.34 -346.46,2291.34 -346.46,2374.02
GND on L2 "GND_L03_P013" (solid, pour order 13): -598.43,2637.8 78.74,2637.8 78.74,-78.74 -669.29,-78.74 -669.29,444.88 -649.61,464.57 -492.13,464.57 -476.38,480.31 -476.38,1275.59 -354.33,1397.64 -354.33,1578.74 -523.62,1748.03 -523.62,2098.43 -444.88,2177.17 -255.91,2177.17 -204.72,2228.35 23.62,2228.35 27.56,2232.28 27.56,2358.27 7.87,2377.95 -259.84,2377.95 -334.65,2303.15 -669.29,2303.15 -669.29,2429.13 -594.49,2429.13 -598.43,2433.07
P3V3 on L2 "NONET_L06_P-001" (solid, remove dead copper, pour order 6): -637.8,472.44 -496.06,472.44 -484.25,484.25 -484.25,673.23 -482.09,1281.69 -362.2,1401.57 -362.2,1570.87 -531.5,1740.16 -531.5,2106.3 -452.76,2185.04 -263.78,2185.04 -212.6,2236.22 15.75,2236.22 15.75,2346.46 -3.94,2366.14 -251.97,2366.14 -326.77,2291.34 -618.11,2291.34 -657.48,2251.97 -657.48,496.06 -637.8,476.38
GND on P4 (split plane): 58.64,-58.64 -649.19,-58.64 -649.19,2372.05 -649.19,2411.01 -600.39,2411.01 -596.47,2411.39 -592.7,2412.54 -589.23,2414.39 -586.18,2416.89 -583.68,2419.94 -581.83,2423.41 -580.68,2427.18 -580.3,2431.1 -580.3,2617.7 58.64,2617.7
GND on G1 (split plane): 58.64,-58.64 -649.19,-58.64 -649.19,2372.05 -649.19,2411.01 -600.39,2411.01 -596.47,2411.39 -592.7,2412.54 -589.23,2414.39 -586.18,2416.89 -583.68,2419.94 -581.83,2423.41 -580.68,2427.18 -580.3,2431.1 -580.3,2617.7 58.64,2617.7

## Keep-outs
TOP:
  lines w1.97: 78.74,1984.25 78.74,2531.5
Keep-Out Layer:
  lines w3.94: 78.74,2228.35 78.74,-78.74 -669.29,-78.74 -669.29,2440.94 -590.55,2440.94 -590.55,2637.8 66.93,2637.8 78.74,2625.98 78.74,2531.5

## Other copper
BOTTOM:
  rectangle net GND: -621.47,1539.37 -523.62,1609.34
  rectangle net NetC22_2: -86.61,1700.79 11.81,1771.65
  rectangle net GND: -267.72,1649.61 -165.35,1720.47
  rectangle net GND: -448.82,1653.54 -350.39,1724.41
  rectangle net P3V3: -181.1,2318.9 20.61,2326.77
  text "milling cuts pads on purpose" at 169.29,2137.8 h20 r90

## Silkscreen, mask and mechanical layers (free items; w line width, h text height)
TopOverlay:
  lines w10: -59.06,2381.89 -19.69,2381.89 ; -39.37,2362.2 -39.37,2401.57
  text "P3V3" at -401.57,2484.25 h30
  text "P12V0" at -103.14,2470.01 h30
  text "N3V0A" at -370.08,2409.45 h30
  text "P3V3A" at -350.39,2330.71 h30
  text "GND" at -657.48,2295.28 h30
  text "P5V0A" at -346.46,2236.22 h30
  text "P1V8A" at -342.52,2157.48 h30
  text "FMC_DAC_125M_14B / 16CHA_PSU v'.P_version'" at -649.61,-59.06 h30
BottomSolder:
  rectangle: -118.11,681.1 -7.87,751.97
  rectangle: -622.6,1538.44 -522.76,1610.36
  rectangle: -449.75,1652.55 -348.34,1725.23
  rectangle: -268.31,1648.73 -164.45,1720.49
  rectangle: -87.59,1699.96 12.86,1772.73
Mechanical 1:
  drawing of 406 lines, arcs and shapes, not listed
  text "Layer" at 753.95,2227.54 h60
  text "Name" at 1163.86,2227.54 h60
  text "Material" at 2033.62,2227.54 h60
  text "Thickness" at 2893.39,2227.54 h60
  text "Constant" at 3543.22,2227.54 h60
  text "Board Layer Stack" at 4113.09,2227.54 h60
  text "TopOverlay" at 1163.86,2107.54 h60
  text "TopSolder" at 1163.86,1987.54 h60
  text "Solder Resist" at 2033.62,1987.54 h60
  text "0.010mm" at 2893.39,1987.54 h60
  text "3.5" at 3543.22,1987.54 h60
  text "1" at 753.95,1867.54 h60
  text "TOP" at 1163.86,1867.54 h60
  text "0.035mm" at 2893.39,1867.54 h60
  text "Dielectric1" at 1163.86,1747.54 h60
  text "FR-4" at 2033.62,1747.54 h60
  text "0.180mm" at 2893.39,1747.54 h60
  text "4.8" at 3543.22,1747.54 h60
  text "2" at 753.95,1627.54 h60
  text "G1" at 1163.86,1627.54 h60
  text "0.018mm" at 2893.39,1627.54 h60
  text "Dielectric2" at 1163.86,1507.54 h60
  text "FR-4" at 2033.62,1507.54 h60
  text "0.300mm" at 2893.39,1507.54 h60
  text "4.8" at 3543.22,1507.54 h60
  text "3" at 753.95,1387.54 h60
  text "L2" at 1163.86,1387.54 h60
  text "0.018mm" at 2893.39,1387.54 h60
  text "Dielectric 3" at 1163.86,1267.54 h60
  text "FR-4" at 2033.62,1267.54 h60
  text "0.180mm" at 2893.39,1267.54 h60
  text "4.8" at 3543.22,1267.54 h60
  text "4" at 753.95,1147.54 h60
  text "L3" at 1163.86,1147.54 h60
  text "CF-004" at 2033.62,1147.54 h60
  text "0.018mm" at 2893.39,1147.54 h60
  text "Dielectric 4" at 1163.86,1027.54 h60
  text "FR-4" at 2033.62,1027.54 h60
  text "0.300mm" at 2893.39,1027.54 h60
  text "4.8" at 3543.22,1027.54 h60
  text "5" at 753.95,907.54 h60
  text "P4" at 1163.86,907.54 h60
  text "0.018mm" at 2893.39,907.54 h60
  text "Dielectric5" at 1163.86,787.54 h60
  text "FR-4" at 2033.62,787.54 h60
  text "0.180mm" at 2893.39,787.54 h60
  text "4.8" at 3543.22,787.54 h60
  text "6" at 753.95,667.54 h60
  text "BOTTOM" at 1163.86,667.54 h60
  text "0.035mm" at 2893.39,667.54 h60
  text "BottomSolder" at 1163.86,547.54 h60
  text "Solder Resist" at 2033.62,547.54 h60
  text "0.010mm" at 2893.39,547.54 h60
  text "3.5" at 3543.22,547.54 h60
  text "BottomOverlay" at 1163.86,427.54 h60
  text "Total board thickness:" at 753.95,307.54 h60
  text "1.302mm" at 2893.39,307.54 h60

## Text inside footprints (layer, text, board x,y; h text height)
IC44: Mechanical 14 "E" at -316.87,484.26 h15.75 r270; Mechanical 14 "D" at -266.87,484.26 h15.75 r270; Mechanical 14 "C" at -216.87,484.26 h15.75 r270; Mechanical 14 "B" at -166.87,484.26 h15.75 r270; Mechanical 14 "A" at -116.87,484.26 h15.75 r270; Mechanical 14 "1" at -71.55,439.26 h15.75 r270; Mechanical 14 "2" at -71.55,389.26 h15.75 r270; Mechanical 14 "3" at -71.55,339.26 h15.75 r270; Mechanical 14 "4" at -71.55,289.26 h15.75 r270; Mechanical 14 "5" at -71.55,239.26 h15.75 r270